# EAGLE board CT_schematic (EAGLE 7.6.0)

Size 100 x 80 mm. Coordinates in mm from the lower left corner, seen from the top.
Outline: 0,0 100,0 100,80 0,80 0,0
Copper layers (1*16): Top 0.035mm / dielectric 1.5mm / Bottom 0.035mm
Design rules "default": minimum track width 10mil, minimum drill 24mil, track to track 8mil, track to pad 8mil, pad to pad 8mil, via to via 8mil, smd to smd 8mil, copper to edge 40mil, drill to drill 8mil, minimum pad ring 10mil, minimum via ring 8mil, stop-mask expansion 4mil, vias tented up to drill 0mil, thermal gap 10mil

## Footprints (pad centres in the part's own frame; a part is rotated, then mirrored left to right if it is on the bottom)
C0603 = smd 0.8 x 0.8: 1 -0.762,0; 2 0.762,0
C0402 = smd 0.5 x 0.5: 1 -0.508,0; 2 0.508,0
C1210 = smd 1.2 x 2.5: 1 -1.524,0; 2 1.524,0
C0805 = smd 1.2 x 1.3: 1 -1.016,0; 2 1.016,0
C1206 = smd 1.3 x 1.6: 1 -1.524,0; 2 1.524,0
R0603 = smd 0.8 x 0.8: 1 -0.762,0; 2 0.762,0
EXV-9H = smd 3.505 x 1.676: 1 -2.857,0; 2 2.857,0
L0603 = smd 0.8 x 0.8: 1 -0.762,0; 2 0.762,0
DR1040 = smd 1.6 x 3.2: 1 -4.458,0; 2 4.458,0
PJ-037B_PACKAGE = drill 3.7 square: 1 12,0 | drill 3.2 square: 2 6,0
TFBGA216 = smd 0.4 x 0.4: A1 -5.6,5.6; A2 -4.8,5.6; A3 -4,5.6; A4 -3.2,5.6; A5 -2.4,5.6; A6 -1.6,5.6; A7 -0.8,5.6; A8 0,5.6; A9 0.8,5.6; A10 1.6,5.6; A11 2.4,5.6; A12 3.2,5.6; A13 4,5.6; A14 4.8,5.6; A15 5.6,5.6; B1 -5.6,4.8; B2 -4.8,4.8; B3 -4,4.8; B4 -3.2,4.8; B5 -2.4,4.8; B6 -1.6,4.8; B7 -0.8,4.8; B8 0,4.8; B9 0.8,4.8; B10 1.6,4.8; B11 2.4,4.8; B12 3.2,4.8; B13 4,4.8; B14 4.8,4.8; B15 5.6,4.8; C1 -5.6,4; C2 -4.8,4; C3 -4,4; C4 -3.2,4; C5 -2.4,4; C6 -1.6,4; C7 -0.8,4; C8 0,4; C9 0.8,4; C10 1.6,4; C11 2.4,4; C12 3.2,4; C13 4,4; C14 4.8,4; C15 5.6,4; D1 -5.6,3.2; D2 -4.8,3.2; D3 -4,3.2; D4 -3.2,3.2; D5 -2.4,3.2; D6 -1.6,3.2; D7 -0.8,3.2; D8 0,3.2; D9 0.8,3.2; D10 1.6,3.2; D11 2.4,3.2; D12 3.2,3.2; D13 4,3.2; D14 4.8,3.2; D15 5.6,3.2; E1 -5.6,2.4; E2 -4.8,2.4; E3 -4,2.4; E4 -3.2,2.4; E5 -2.4,2.4; E6 -1.6,2.4; E7 -0.8,2.4; E8 0,2.4; E9 0.8,2.4; E10 1.6,2.4; E11 2.4,2.4; E12 3.2,2.4; E13 4,2.4; E14 4.8,2.4; E15 5.6,2.4; F1 -5.6,1.6; F2 -4.8,1.6; F3 -4,1.6; F4 -3.2,1.6; F5 -2.4,1.6; F6 -1.6,1.6; F7 -0.8,1.6; F8 0,1.6; F9 0.8,1.6; F10 1.6,1.6; F11 2.4,1.6; F12 3.2,1.6; F13 4,1.6; F14 4.8,1.6; F15 5.6,1.6; G1 -5.6,0.8; G2 -4.8,0.8; G3 -4,0.8; G4 -3.2,0.8; G5 -2.4,0.8; G6 -1.6,0.8; G10 1.6,0.8; G11 2.4,0.8; G12 3.2,0.8; G13 4,0.8; G14 4.8,0.8; G15 5.6,0.8; H1 -5.6,0; H2 -4.8,0; H3 -4,0; H4 -3.2,0; H5 -2.4,0; H6 -1.6,0; H10 1.6,0; H11 2.4,0; H12 3.2,0; H13 4,0; H14 4.8,0; H15 5.6,0; J1 -5.6,-0.8; J2 -4.8,-0.8; J3 -4,-0.8; J4 -3.2,-0.8; J5 -2.4,-0.8; J6 -1.6,-0.8; J10 1.6,-0.8; J11 2.4,-0.8; J12 3.2,-0.8; J13 4,-0.8; J14 4.8,-0.8; J15 5.6,-0.8; K1 -5.6,-1.6; K2 -4.8,-1.6; K3 -4,-1.6; K4 -3.2,-1.6; K5 -2.4,-1.6; K6 -1.6,-1.6; K7 -0.8,-1.6; K8 0,-1.6; K9 0.8,-1.6; K10 1.6,-1.6; K11 2.4,-1.6; K12 3.2,-1.6; K13 4,-1.6; K14 4.8,-1.6; K15 5.6,-1.6; L1 -5.6,-2.4; L2 -4.8,-2.4; L3 -4,-2.4; L4 -3.2,-2.4; L5 -2.4,-2.4; L6 -1.6,-2.4; L7 -0.8,-2.4; L8 0,-2.4; L9 0.8,-2.4; L10 1.6,-2.4; L11 2.4,-2.4; L12 3.2,-2.4; L13 4,-2.4; L14 4.8,-2.4; L15 5.6,-2.4; M1 -5.6,-3.2; M2 -4.8,-3.2; M3 -4,-3.2; M4 -3.2,-3.2; M5 -2.4,-3.2; M6 -1.6,-3.2; M7 -0.8,-3.2; M8 0,-3.2; M9 0.8,-3.2; M10 1.6,-3.2; M11 2.4,-3.2; M12 3.2,-3.2; M13 4,-3.2; M14 4.8,-3.2; M15 5.6,-3.2; N1 -5.6,-4; N2 -4.8,-4; N3 -4,-4; N4 -3.2,-4; N5 -2.4,-4; N6 -1.6,-4; N7 -0.8,-4; N8 0,-4; N9 0.8,-4; N10 1.6,-4; N11 2.4,-4; N12 3.2,-4; N13 4,-4; N14 4.8,-4; N15 5.6,-4; P1 -5.6,-4.8; P2 -4.8,-4.8; P3 -4,-4.8; P4 -3.2,-4.8; P5 -2.4,-4.8; P6 -1.6,-4.8; P7 -0.8,-4.8; P8 0,-4.8; P9 0.8,-4.8; P10 1.6,-4.8; P11 2.4,-4.8; P12 3.2,-4.8; P13 4,-4.8; P14 4.8,-4.8; P15 5.6,-4.8; R1 -5.6,-5.6; R2 -4.8,-5.6; R3 -4,-5.6; R4 -3.2,-5.6; R5 -2.4,-5.6; R6 -1.6,-5.6; R7 -0.8,-5.6; R8 0,-5.6; R9 0.8,-5.6; R10 1.6,-5.6; R11 2.4,-5.6; R12 3.2,-5.6; R13 4,-5.6; R14 4.8,-5.6; R15 5.6,-5.6
SOT-23-6 = smd 1.1 x 0.6: 1 -1.4,0.95; 2 -1.4,0; 3 -1.4,-0.95; 4 1.4,-0.95; 5 1.4,0; 6 1.4,0.95
ARDUCAM = drill 1 pad 1.8 square: 1 0,0 | drill 1 pad 1.8: 2 0,2.54; 3 2.54,0; 4 2.54,2.54; 5 5.08,0; 6 5.08,2.54; 7 7.62,0; 8 7.62,2.54; 9 10.16,0; 10 10.16,2.54; 11 12.7,0; 12 12.7,2.54; 13 15.24,0; 14 15.24,2.54; 15 17.78,0; 16 17.78,2.54; 17 20.32,0; 18 20.32,2.54; 19 22.86,0; 20 22.86,2.54
WSON-8-PAD = smd 0.45 x 0.7: 1 -0.75,-0.95; 2 0.52,-0.95; 3 1.79,-0.95; 4 3.06,-0.95; 5 3.06,4.35; 6 1.79,4.35; 7 0.52,4.35; 8 -0.75,4.35 | smd 4 x 3.5: PAD 1.15,1.7
USB-A-H = drill 0.914: 1 2.718,3.493; 2 2.718,1.003; 3 2.718,-1.003; 4 2.718,-3.493 | drill 2.311: 5 0,-6.566; 6 0,6.566
SOT143B = smd 1 x 0.7: 1 -0.75,-1 | smd 0.6 x 0.7: 2 0.95,-1; 3 0.95,1; 4 -0.95,1
ABS07-32.768KHZ-7-T = smd 1.1 x 2.4: 1 -2.5,0; 2 0,0
ASFL1 = smd 1.7 x 1.5: 1 -1.27,-1.1; 2 1.27,-1.1; 3 1.27,1.1; 4 -1.27,1.1
IDT74FCT38072 = smd 0.51 x 1: 1 0,0; 2 1.27,0; 3 2.54,0; 4 3.81,0; 5 3.81,4.95; 6 2.54,4.95; 7 1.27,4.95; 8 0,4.95
WSON-8 = smd 0.3 x 0.6: 1 -0.75,0; 2 0.05,0; 3 0.85,0; 4 1.65,0; 5 1.65,3.8; 6 0.85,3.8; 7 0.05,3.8; 8 -0.75,3.8 | smd 3 x 2.6: PAD 0.45,1.9
HTSSOP14 = smd 1.676 x 0.356: 1 -2.8,1.95; 2 -2.8,1.3; 3 -2.8,0.65; 4 -2.8,0; 5 -2.8,-0.65; 6 -2.8,-1.3; 7 -2.8,-1.95; 8 2.8,-1.95; 9 2.8,-1.3; 10 2.8,-0.65; 11 2.8,0; 12 2.8,0.65; 13 2.8,1.3; 14 2.8,1.95 | smd 3 x 5: 15 0,0 | drill 0.4 pad 0.45: P$1 -0.75,1.5; P$2 0.75,1.5; P$3 -0.75,0; P$4 0.8,0; P$5 -0.75,-1.5; P$6 0.9,-1.5
QFN-38_UHF = smd 0.75 x 0.3: 1 -2.4,2.75; 2 -2.4,2.25; 3 -2.4,1.75; 4 -2.4,1.25; 6 -2.4,0.25; 7 -2.4,-0.25; 8 -2.4,-0.75; 9 -2.4,-1.25; 10 -2.4,-1.75; 11 -2.4,-2.25; 12 -2.4,-2.75; 20 2.4,-2.75; 21 2.4,-2.25; 22 2.4,-1.75; 23 2.4,-1.25; 24 2.4,-0.75; 25 2.4,-0.25; 26 2.4,0.25; 27 2.4,0.75; 28 2.4,1.25; 29 2.4,1.75; 30 2.4,2.25; 31 2.4,2.75 | smd 0.758 x 0.3: 5 -2.4,0.75 | smd 0.3 x 0.75: 13 -1.5,-3.4; 14 -1,-3.4; 15 -0.5,-3.4; 16 0,-3.4; 17 0.5,-3.4; 18 1,-3.4; 19 1.5,-3.4; 32 1.5,3.4; 33 1,3.4; 34 0.5,3.4; 35 0,3.4; 36 -0.5,3.4; 37 -1,3.4; 38 -1.5,3.4 | smd 3.2 x 5.2: 39 0,0
IRF8306MTRPBF = smd 0.9 x 1.85: 1 0,0; 2 0,-2.35; 6 6.4,0; 7 6.4,-2.35 | smd 0.75 x 0.75: 3 1.75,-1.175 | smd 1.45 x 0.87: 4 3.5,-0.565; 5 3.5,-1.785
SW_4-1437565-2 = smd 1.4 x 2.1: 1 -2.23,4.55; 2 -2.23,-4.55; 3 2.23,4.55; 4 2.23,-4.55
LGM67K-G1J2-24-Z = smd 0.8 x 1.4: A -2,0; C 0,0
NC7SZ125M5X = smd 1.3 x 0.7: 1 -1.3,0.95; 2 -1.3,0; 3 -1.3,-0.95; 4 1.3,-0.95; 5 1.3,0.95
DUMMY_PACKAGE_251 = drill 0.3: 1 0,-1; 2 1.5,-1; 3 3,-1

## Placement (x,y rotation side)
C1  1e-06  [C0603]  -31.75,74.93 0 top  (outside the outline)
C2  1e-07  [C0603]  -35.56,74.93 0 top  (outside the outline)
C3  1e-07  [C0603]  -39.37,74.93 0 top  (outside the outline)
C4  1e-07  [C0603]  -43.18,74.93 0 top  (outside the outline)
C5  1e-07  [C0603]  -46.99,74.93 0 top  (outside the outline)
C6  1e-07  [C0603]  -50.8,74.93 0 top  (outside the outline)
C7  1e-07  [C0603]  -54.61,74.93 0 top  (outside the outline)
C8  1e-07  [C0603]  -58.42,74.93 0 top  (outside the outline)
C9  1e-07  [C0603]  -62.23,74.93 0 top  (outside the outline)
C10  1e-07  [C0603]  -66.04,74.93 0 top  (outside the outline)
C11  1e-07  [C0603]  -69.85,74.93 0 top  (outside the outline)
C12  1e-07  [C0603]  -73.66,74.93 0 top  (outside the outline)
C13  1e-07  [C0603]  -77.47,74.93 0 top  (outside the outline)
C14  1e-07  [C0603]  -81.28,74.93 0 top  (outside the outline)
C15  1e-07  [C0603]  -85.09,74.93 0 top  (outside the outline)
C16  1e-07  [C0603]  -15.24,80.01 0 top  (outside the outline)
C17  1e-07  [C0603]  -19.05,80.01 0 top  (outside the outline)
C18  1e-07  [C0603]  -22.86,80.01 0 top  (outside the outline)
C19  1e-07  [C0603]  -26.67,80.01 0 top  (outside the outline)
C20  1e-07  [C0603]  -30.48,80.01 0 top  (outside the outline)
C21  1e-07  [C0603]  -34.29,80.01 0 top  (outside the outline)
C22  4.7e-06  [C0603]  -24.13,74.93 0 top  (outside the outline)
C23  1e-08  [C0603]  -38.1,80.01 0 top  (outside the outline)
C24  1e-06  [C0603]  -41.91,80.01 0 top  (outside the outline)
C25  1e-07  [C0603]  -45.72,80.01 0 top  (outside the outline)
C26  1e-07  [C0603]  -49.53,80.01 0 top  (outside the outline)
C27  1e-07  [C0603]  -53.34,80.01 0 top  (outside the outline)
C28  1e-11  [C0402]  -46.99,85.09 0 top  (outside the outline)
C29  1e-11  [C0402]  -50.8,85.09 0 top  (outside the outline)
C30  1e-06  [C0603]  -57.15,80.01 0 top  (outside the outline)
C31  1e-06  [C0603]  -60.96,80.01 0 top  (outside the outline)
C32  1e-08  [C0402]  -54.61,85.09 0 top  (outside the outline)
C33  1e-08  [C0402]  -58.42,85.09 0 top  (outside the outline)
C34  1e-08  [C0402]  -62.23,85.09 0 top  (outside the outline)
C35  1e-05  [C1210]  -16.51,58.42 0 top  (outside the outline)
C36  1e-05  [C0805]  -15.24,64.77 0 top  (outside the outline)
C37  1e-06  [C0603]  -64.77,80.01 0 top  (outside the outline)
C38  3.3e-09  [C0402]  -43.18,85.09 0 top  (outside the outline)
C39  1e-07  [C0402]  -66.04,85.09 0 top  (outside the outline)
C40  2.2e-05  [C1210]  -22.86,58.42 0 top  (outside the outline)
C41  2.2e-05  [C1210]  -29.21,58.42 0 top  (outside the outline)
C42  1e-05  [C1206]  -54.61,58.42 0 top  (outside the outline)
C43  1e-05  [C1206]  -60.96,58.42 0 top  (outside the outline)
C44  1e-08  [C0402]  -69.85,85.09 0 top  (outside the outline)
C45  1e-05  [C1210]  -35.56,58.42 0 top  (outside the outline)
C46  1e-05  [C1210]  -41.91,58.42 0 top  (outside the outline)
C47  1e-08  [C0402]  -73.66,85.09 0 top  (outside the outline)
C48  1e-05  [C1210]  -48.26,58.42 0 top  (outside the outline)
C49  1e-05  [C0805]  -20.32,64.77 0 top  (outside the outline)
C50  1e-07  [C0402]  -77.47,85.09 0 top  (outside the outline)
C51  2.2e-06  [C0603]  -27.94,74.93 0 top  (outside the outline)
C52  2.45e-08  [R0603]  -71.12,64.77 0 top  (outside the outline)
C53  2.8258362168397e-09  [R0603]  -30.48,64.77 0 top  (outside the outline)
C54  7.105e-09  [R0603]  -50.8,64.77 0 top  (outside the outline)
C55  0.0001  [EXV-9H]  -62.23,41.91 0 top  (outside the outline)
C56  0.0001  [EXV-9H]  -73.66,41.91 0 top  (outside the outline)
C57  1e-08  [C0402]  -81.28,85.09 0 top  (outside the outline)
C58  1e-08  [C0402]  -85.09,85.09 0 top  (outside the outline)
C59  1e-08  [C0402]  -15.24,90.17 0 top  (outside the outline)
F1  240.0  [L0603]  -68.58,80.01 0 top  (outside the outline)
I1  7e-06  [DR1040]  -36.83,22.86 0 top  (outside the outline)
J1  PJ-037B  [PJ-037B_PACKAGE]  -63.5,7.62 0 top  (outside the outline)
R2  1000.0  [R0603]  -72.39,80.01 0 top  (outside the outline)
R7  4700.0  [R0603]  -76.2,80.01 0 top  (outside the outline)
R8  4700.0  [R0603]  -80.01,80.01 0 top  (outside the outline)
R9  4700.0  [R0603]  -83.82,80.01 0 top  (outside the outline)
R10  47000.0  [R0603]  -76.2,64.77 0 top  (outside the outline)
R11  10000.0  [R0603]  -81.28,64.77 0 top  (outside the outline)
R12  10000.0  [R0603]  -15.24,69.85 0 top  (outside the outline)
R13  10000.0  [R0603]  -20.32,69.85 0 top  (outside the outline)
R14  10000.0  [R0603]  -25.4,69.85 0 top  (outside the outline)
R15  10000.0  [R0603]  -30.48,69.85 0 top  (outside the outline)
R16  1270.0  [R0603]  -15.24,85.09 0 top  (outside the outline)
R17  10000.0  [R0603]  -35.56,69.85 0 top  (outside the outline)
R18  10000.0  [R0603]  -40.64,69.85 0 top  (outside the outline)
R19  100000.0  [R0603]  -55.88,64.77 0 top  (outside the outline)
R20  200.0  [R0603]  -19.05,85.09 0 top  (outside the outline)
R21  1000.0  [R0603]  -22.86,85.09 0 top  (outside the outline)
R22  71007.101651032  [R0603]  -38.1,64.77 0 top  (outside the outline)
R23  22000.0  [R0603]  -45.72,69.85 0 top  (outside the outline)
R24  100000.0  [R0603]  -60.96,64.77 0 top  (outside the outline)
R25  3900.0  [R0603]  -26.67,85.09 0 top  (outside the outline)
R26  1000.0  [R0603]  -30.48,85.09 0 top  (outside the outline)
R27  100000.0  [R0603]  -66.04,64.77 0 top  (outside the outline)
R28  200.0  [R0603]  -34.29,85.09 0 top  (outside the outline)
R29  1000.0  [R0603]  -38.1,85.09 0 top  (outside the outline)
R30  10000.0  [R0603]  -50.8,69.85 0 top  (outside the outline)
R31  75000.0  [R0603]  -55.88,69.85 0 top  (outside the outline)
R32  10000.0  [R0603]  -60.96,69.85 0 top  (outside the outline)
R33  10000.0  [R0603]  -66.04,69.85 0 top  (outside the outline)
R34  95300.0  [R0603]  -71.12,69.85 0 top  (outside the outline)
R35  95300.0  [R0603]  -76.2,69.85 0 top  (outside the outline)
R36  10000.0  [R0603]  -81.28,69.85 0 top  (outside the outline)
R37  10000.0  [R0603]  -15.24,74.93 0 top  (outside the outline)
R38  10000.0  [R0603]  -20.32,74.93 0 top  (outside the outline)
R39  120272.72727273  [R0603]  -45.72,64.77 0 top  (outside the outline)
U1  STM32F756NGH6  [TFBGA216]  -24.13,8.89 0 top  (outside the outline)
U2  MAX4995AAUT+T  [SOT-23-6]  -66.04,57.15 0 top  (outside the outline)
U3  arducam_ov2640  [ARDUCAM]  -59.69,49.53 0 top  (outside the outline)
U4  MX25R6435FZAIH0  [WSON-8-PAD]  -27.94,21.59 0 top  (outside the outline)
U5  61400416021  [USB-A-H]  -38.1,8.89 0 top  (outside the outline)
U6  prtr5v0u2ax  [SOT143B]  -27.94,90.17 0 top  (outside the outline)
U7  ABS07-32.768KHZ-7-T  [ABS07-32.768KHZ-7-T]  -27.94,52.07 0 top  (outside the outline)
U8  ASFL1-25MHZ-NCS  [ASFL1]  -26.67,43.18 0 top  (outside the outline)
U9  idt74fct38072  [IDT74FCT38072]  -55.88,39.37 0 top  (outside the outline)
U10  LP3878SDX-ADJ/NOPB  [WSON-8]  -30.48,31.75 0 top  (outside the outline)
U11  tps54225PWP  [HTSSOP14]  -67.31,50.8 0 top  (outside the outline)
U12  LP3878SDX-ADJ/NOPB  [WSON-8]  -50.8,31.75 0 top  (outside the outline)
U13  LP3878SDX-ADJ/NOPB  [WSON-8]  -71.12,31.75 0 top  (outside the outline)
U14  LTC2928CUHF#PBF  [QFN-38_UHF]  -34.29,41.91 0 top  (outside the outline)
U15  IRF8306MTRPbF  [IRF8306MTRPBF]  -55.88,24.13 0 top  (outside the outline)
U16  IRF8306MTRPbF  [IRF8306MTRPBF]  -71.12,24.13 0 top  (outside the outline)
U17  4-1437565-2  [SW_4-1437565-2]  -80.01,6.35 0 top  (outside the outline)
U18  Q65110A2395  [LGM67K-G1J2-24-Z]  -76.2,50.8 0 top  (outside the outline)
U19  nc7sz125m5x  [NC7SZ125M5X]  -71.12,58.42 0 top  (outside the outline)
U20  nc7sz125m5x  [NC7SZ125M5X]  -77.47,58.42 0 top  (outside the outline)
U21  nc7sz125m5x  [NC7SZ125M5X]  -83.82,58.42 0 top  (outside the outline)
U22  Dummy  [DUMMY_PACKAGE_251]  -34.29,90.17 0 top  (outside the outline)

## Library data of the parts
C1-C59 F1 I1 J1 R2 R7-R39 U1-U22 = circuit_tree

## Nets
CLK_CRYSTAL_U1_E1: C28.1 U1.E1 U7.1
CLK_CRYSTAL_U1_F1: C29.1 U1.F1 U7.2
CLK_U1_G1: U1.G1 U9.6
CLK_U3_8: U3.8 U9.7
CLK_U9_3: U8.3 U9.3
GND: C1.2 C2.2 C3.2 C4.2 C5.2 C6.2 C7.2 C8.2 C9.2 C10.2 C11.2 C12.2 C13.2 C14.2 C15.2 C16.2 C17.2 C18.2 C19.2 C20.2 C21.2 C22.2 C23.2 C24.2 C25.2 C26.2 C27.2 C28.2 C29.2 C30.2 C31.2 C32.2 C33.2 C34.2 C35.2 C36.2 C37.2 C38.2 C40.2 C41.2 C42.2 C43.2 C44.2 C45.2 C46.2 C47.2 C48.2 C49.2 C50.2 C51.2 C52.2 C53.2 C54.2 C55.2 C56.2 C57.2 C58.2 C59.2 J1.2 R2.2 R10.2 R11.2 R15.2 R16.2 R21.2 R23.2 R26.2 R29.2 R31.2 R34.2 R35.2 R36.2 R37.2 R38.2 U1.D15 U1.F2 U1.F6 U1.F7 U1.F8 U1.F9 U1.F10 U1.G6 U1.G10 U1.H6 U1.H10 U1.J6 U1.J10 U1.K6 U1.K7 U1.K8 U1.K9 U1.K10 U1.L6 U1.M1 U1.N1 U2.2 U3.2 U3.20 U4.4 U4.PAD U5.4 U5.5 U5.6 U6.1 U8.2 U9.4 U9.5 U9.8 U10.3 U10.PAD U11.5 U11.8 U11.9 U11.15 U12.3 U12.PAD U13.3 U13.PAD U14.8 U14.9 U14.10 U14.12 U14.13 U14.24 U14.25 U14.30 U14.32 U14.39 U18.C U19.1 U19.3 U20.1 U20.3 U21.1 U21.3 U22.1
NET_U1_E5: R12.1 U1.E5
NET_U1_E6: R11.1 U1.E6
NET_U1_E11: C27.1 U1.E11
NET_U1_J1: R8.1 U1.J1 U20.4
NET_U1_L5: R13.1 U1.L5
NET_U1_R1: C23.1 C24.1 F1.1 U1.P1 U1.R1
NET_U1_R14: U18.A
NET_U1_R15: U17.3 U17.4
NET_U2_3: R10.1 U2.3
NET_U3_19: R9.1 U3.19 U21.4
NET_U4_7: R7.1 U1.K2 U4.7 U19.4
NET_U10_1: C34.1 U10.1
NET_U10_6: R20.2 R21.1 U10.6
NET_U10_8: R19.1 U10.8
NET_U11_2: R22.2 R23.1 U11.2
NET_U11_3: C37.1 U11.3
NET_U11_4: C38.1 U11.4
NET_U11_10: C39.1 I1.1 U11.10 U11.11
NET_U11_12: C39.2 U11.12
NET_U12_1: C44.1 U12.1
NET_U12_6: R25.2 R26.1 U12.6
NET_U12_8: R24.1 U12.8
NET_U13_1: C47.1 U13.1
NET_U13_6: R28.2 R29.1 U13.6
NET_U13_8: R27.1 U13.8
NET_U14_3: R37.1 U14.3
NET_U14_6: R34.1 U14.6
NET_U14_7: R35.1 U14.7
NET_U14_16: R36.1 R39.1 U14.16
NET_U14_18: R33.1 U14.18
NET_U14_19: R32.1 U14.19 U14.20
NET_U14_21: R30.1 R31.1 U14.21 U19.2 U20.2 U21.2
NET_U14_22: C50.1 R30.2 R32.2 R33.2 U14.11 U14.22
NET_U14_26: C53.1 U14.26
NET_U14_27: C52.1 U14.27
NET_U14_28: C54.1 U14.28
NET_U14_38: R38.1 U14.38
NET_U15_3: U14.2 U15.3
NET_U16_3: U14.37 U16.3
NET_U17_1: R2.1 U17.1 U17.2
PROC_DCMI_D0: U1.H15 U3.18
PROC_DCMI_D1: R16.1 U1.D15 U3.17
PROC_DCMI_D2: U1.A6 U3.16
PROC_DCMI_D3: U1.A5 U3.15
PROC_DCMI_D4: U1.A1 U3.14
PROC_DCMI_D5: U1.C3 U3.13
PROC_DCMI_D6: U1.A7 U3.12
PROC_DCMI_D7: U1.B2 U3.11
PROC_DCMI_D8: U1.B14 U3.10
PROC_DCMI_D9: U1.A12 U3.9
PROC_DCMI_HSYNC: U1.N4 U3.6
PROC_DCMI_PIXCLK: U1.P3 U3.7
PROC_DCMI_VSYNC: U1.B5 U3.5
PROC_GPIO_TO_U1_USB_FAULT: R14.1 R15.1 U1.A4 U2.6
PROC_GPIO_TO_U1_VBUS_EN: R15.1 U1.A2 U2.4
PROC_QUADSPI_BK1_IO0: U1.F14 U4.5
PROC_QUADSPI_BK1_IO1: U1.L2 U4.2
PROC_QUADSPI_BK1_IO2: R18.1 U1.A3 U4.3
PROC_QUADSPI_BK1_NCS: R17.1 U1.B6 U4.1
PROC_QUADSPI_CLK: U1.M5 U4.6
PROC_TIM1_CH1: U1.F15 U22.2
PROC_TIM1_CH2N: U1.R5 U22.3
PROC_USB_OTG_FS_DM: U5.2 U6.3
PROC_USB_OTG_FS_DP: U5.3 U6.2
PROC_USB_OTG_FS_VBUS: U2.1 U5.1 U6.4
VCC_14V6: C51.1 C55.1 C56.1 J1.1 R39.2 U14.23 U15.1 U15.2 U15.6 U15.7 U16.1 U16.2 U16.6 U16.7
VCC_S1_14V6: C35.1 C42.1 C43.1 C45.1 R19.2 R24.2 U10.4 U11.7 U11.13 U11.14 U12.4 U15.4 U15.5
VCC_S2_14V6: C48.1 R27.2 U13.4 U16.4 U16.5
VCC_TIER1_1V2: C26.1 C36.1 R20.1 U1.L11 U10.5
VCC_TIER1_3V3: C1.1 C2.1 C3.1 C4.1 C5.1 C6.1 C7.1 C8.1 C9.1 C10.1 C11.1 C12.1 C13.1 C14.1 C15.1 C16.1 C17.1 C18.1 C19.1 C20.1 C21.1 C22.1 C25.1 C30.1 C31.1 C32.1 C33.1 C40.1 C41.1 C57.1 C58.1 C59.1 F1.2 I1.2 R7.2 R8.2 R9.2 R12.2 R13.2 R14.2 R17.2 R18.2 R22.1 U1.C1 U1.E7 U1.E8 U1.E9 U1.E10 U1.F4 U1.F5 U1.F11 U1.G5 U1.G11 U1.H5 U1.H11 U1.J5 U1.J11 U1.K5 U1.K11 U1.L7 U1.L8 U1.L9 U1.L10 U3.1 U4.8 U8.4 U9.1 U9.2 U11.1 U19.5 U20.5 U21.5
VCC_TIER1_5V0: C46.1 R25.1 U2.5 U12.5
VCC_TIER2_1V2: C49.1 R28.1 U13.5

## Tracks (layer width: path | path; a pad name or v marks a point on that pad's centre or on a via)
CLK_CRYSTAL_U1_E1  (2 unrouted)
CLK_CRYSTAL_U1_F1  (2 unrouted)
CLK_U1_G1  (1 unrouted)
CLK_U3_8  (1 unrouted)
CLK_U9_3  (1 unrouted)
GND  (135 unrouted)
NET_U1_E5  (1 unrouted)
NET_U1_E6  (1 unrouted)
NET_U1_E11  (1 unrouted)
NET_U1_J1  (2 unrouted)
NET_U1_L5  (1 unrouted)
NET_U1_R1  (4 unrouted)
NET_U1_R15  (1 unrouted)
NET_U2_3  (1 unrouted)
NET_U3_19  (2 unrouted)
NET_U4_7  (3 unrouted)
NET_U10_1  (1 unrouted)
NET_U10_6  (2 unrouted)
NET_U10_8  (1 unrouted)
NET_U11_2  (2 unrouted)
NET_U11_3  (1 unrouted)
NET_U11_4  (1 unrouted)
NET_U11_10  (3 unrouted)
NET_U11_12  (1 unrouted)
NET_U12_1  (1 unrouted)
NET_U12_6  (2 unrouted)
NET_U12_8  (1 unrouted)
NET_U13_1  (1 unrouted)
NET_U13_6  (2 unrouted)
NET_U13_8  (1 unrouted)
NET_U14_3  (1 unrouted)
NET_U14_6  (1 unrouted)
NET_U14_7  (1 unrouted)
NET_U14_16  (2 unrouted)
NET_U14_18  (1 unrouted)
NET_U14_19  (2 unrouted)
NET_U14_21  (5 unrouted)
NET_U14_22  (5 unrouted)
NET_U14_26  (1 unrouted)
NET_U14_27  (1 unrouted)
NET_U14_28  (1 unrouted)
NET_U14_38  (1 unrouted)
NET_U15_3  (1 unrouted)
NET_U16_3  (1 unrouted)
NET_U17_1  (2 unrouted)
PROC_DCMI_D0  (1 unrouted)
PROC_DCMI_D1  (2 unrouted)
PROC_DCMI_D2  (1 unrouted)
PROC_DCMI_D3  (1 unrouted)
PROC_DCMI_D4  (1 unrouted)
PROC_DCMI_D5  (1 unrouted)
PROC_DCMI_D6  (1 unrouted)
PROC_DCMI_D7  (1 unrouted)
PROC_DCMI_D8  (1 unrouted)
PROC_DCMI_D9  (1 unrouted)
PROC_DCMI_HSYNC  (1 unrouted)
PROC_DCMI_PIXCLK  (1 unrouted)
PROC_DCMI_VSYNC  (1 unrouted)
PROC_GPIO_TO_U1_USB_FAULT  (3 unrouted)
PROC_GPIO_TO_U1_VBUS_EN  (2 unrouted)
PROC_QUADSPI_BK1_IO0  (1 unrouted)
PROC_QUADSPI_BK1_IO1  (1 unrouted)
PROC_QUADSPI_BK1_IO2  (2 unrouted)
PROC_QUADSPI_BK1_NCS  (2 unrouted)
PROC_QUADSPI_CLK  (1 unrouted)
PROC_TIM1_CH1  (1 unrouted)
PROC_TIM1_CH2N  (1 unrouted)
PROC_USB_OTG_FS_DM  (1 unrouted)
PROC_USB_OTG_FS_DP  (1 unrouted)
PROC_USB_OTG_FS_VBUS  (2 unrouted)
VCC_14V6  (13 unrouted)
VCC_S1_14V6  (12 unrouted)
VCC_S2_14V6  (4 unrouted)
VCC_TIER1_1V2  (4 unrouted)
VCC_TIER1_3V3  (71 unrouted)
VCC_TIER1_5V0  (3 unrouted)
VCC_TIER2_1V2  (2 unrouted)